# Altium PCB PCB2.PcbDoc
Units mm, origin at the board's own origin, x right, y up, seen from the top; angles counter-clockwise.
Board outline 50 x 50 mm, 2 copper layers (Top Layer, Bottom Layer); 13 components, 10 nets, 35 pads, 6 vias.
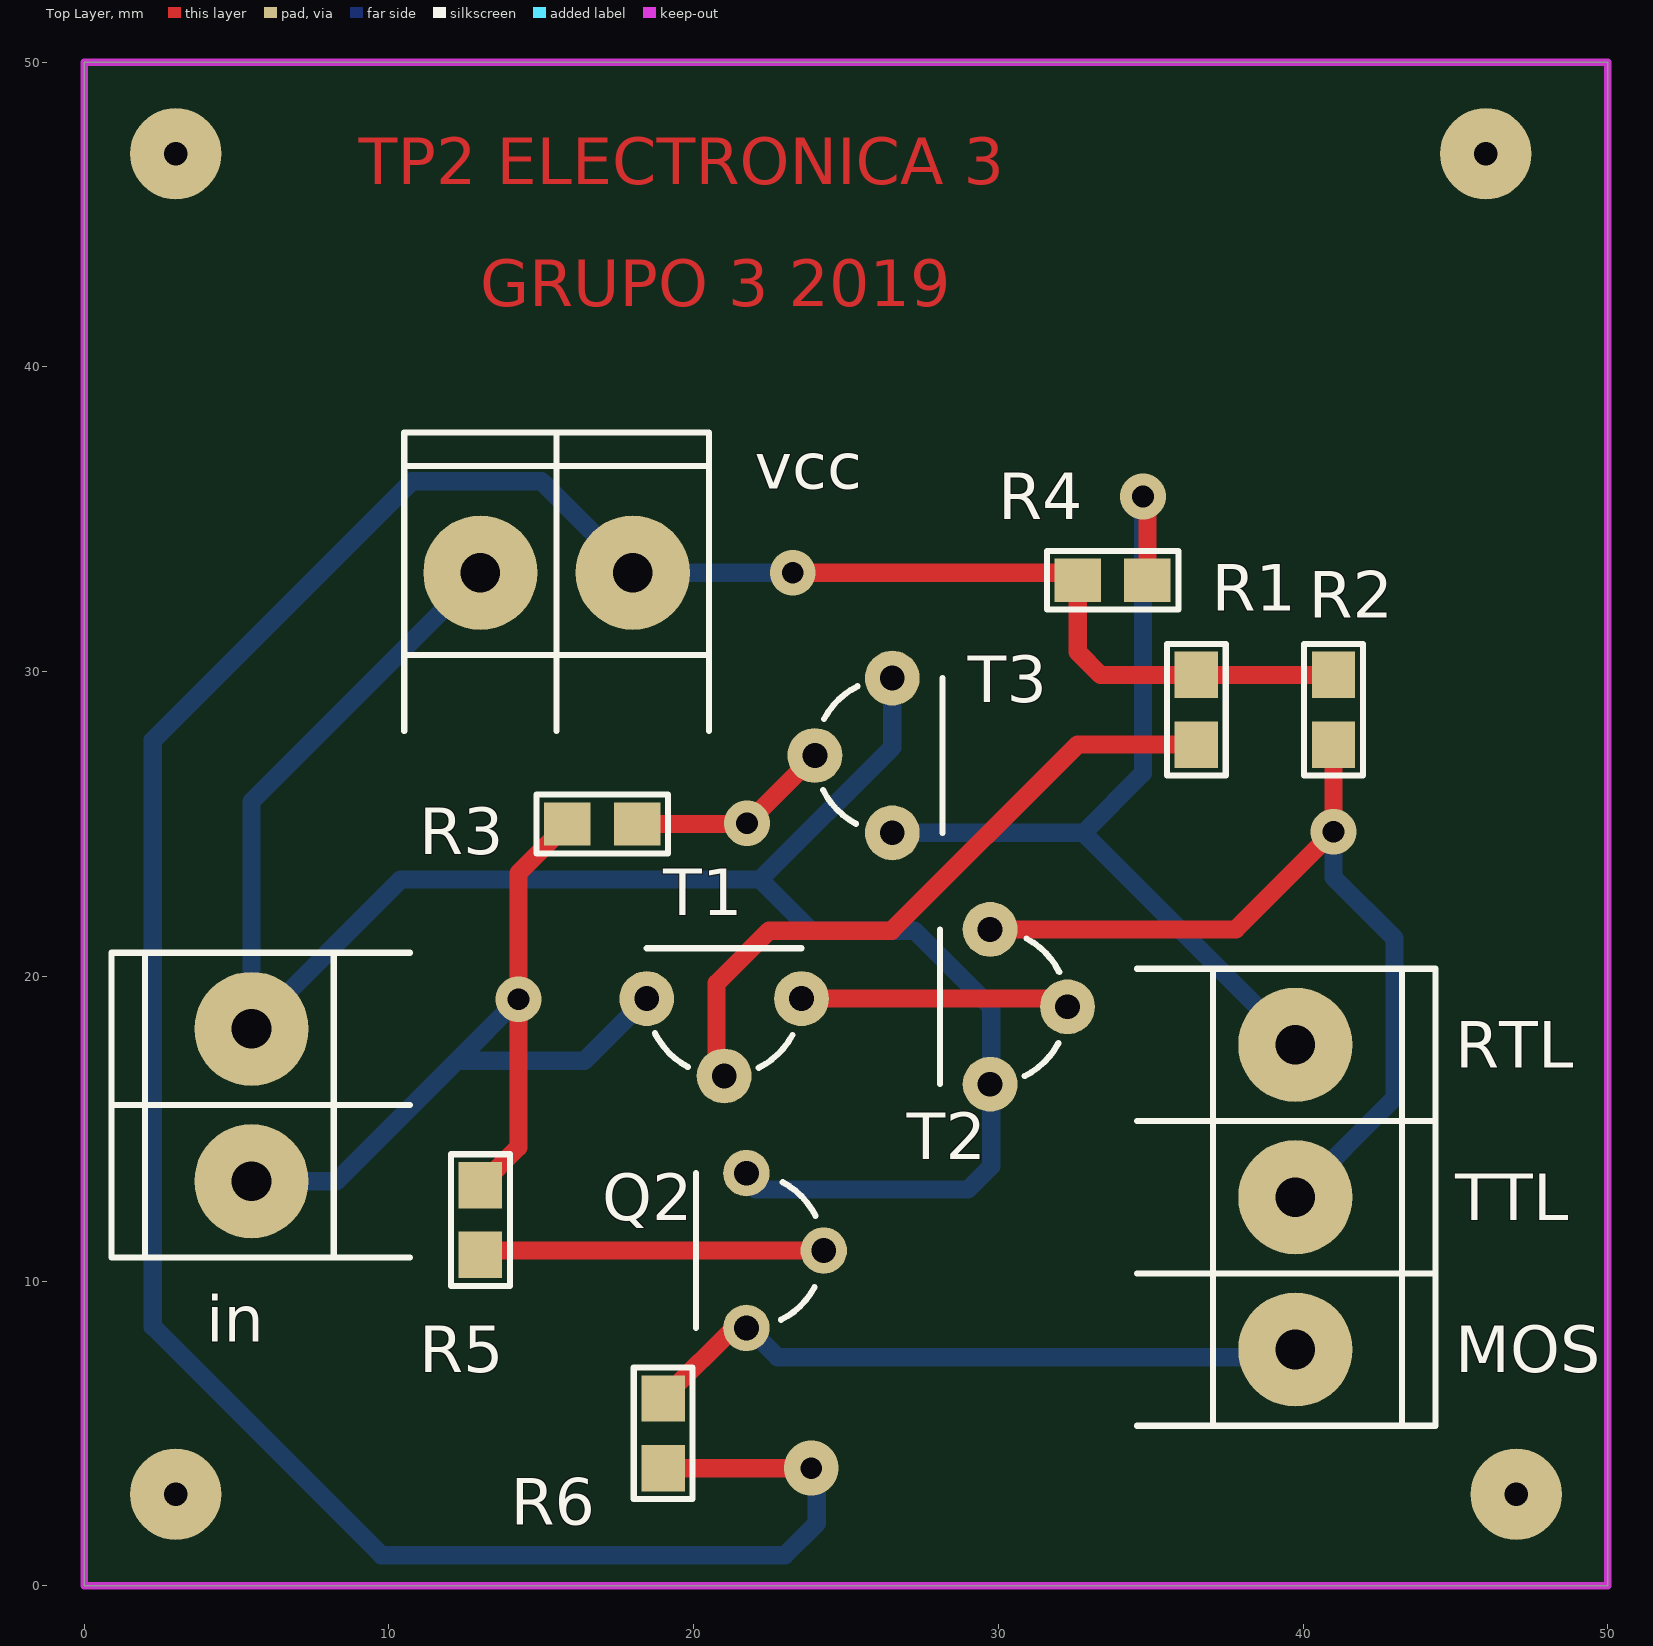
[diagram p0: Top Layer view]
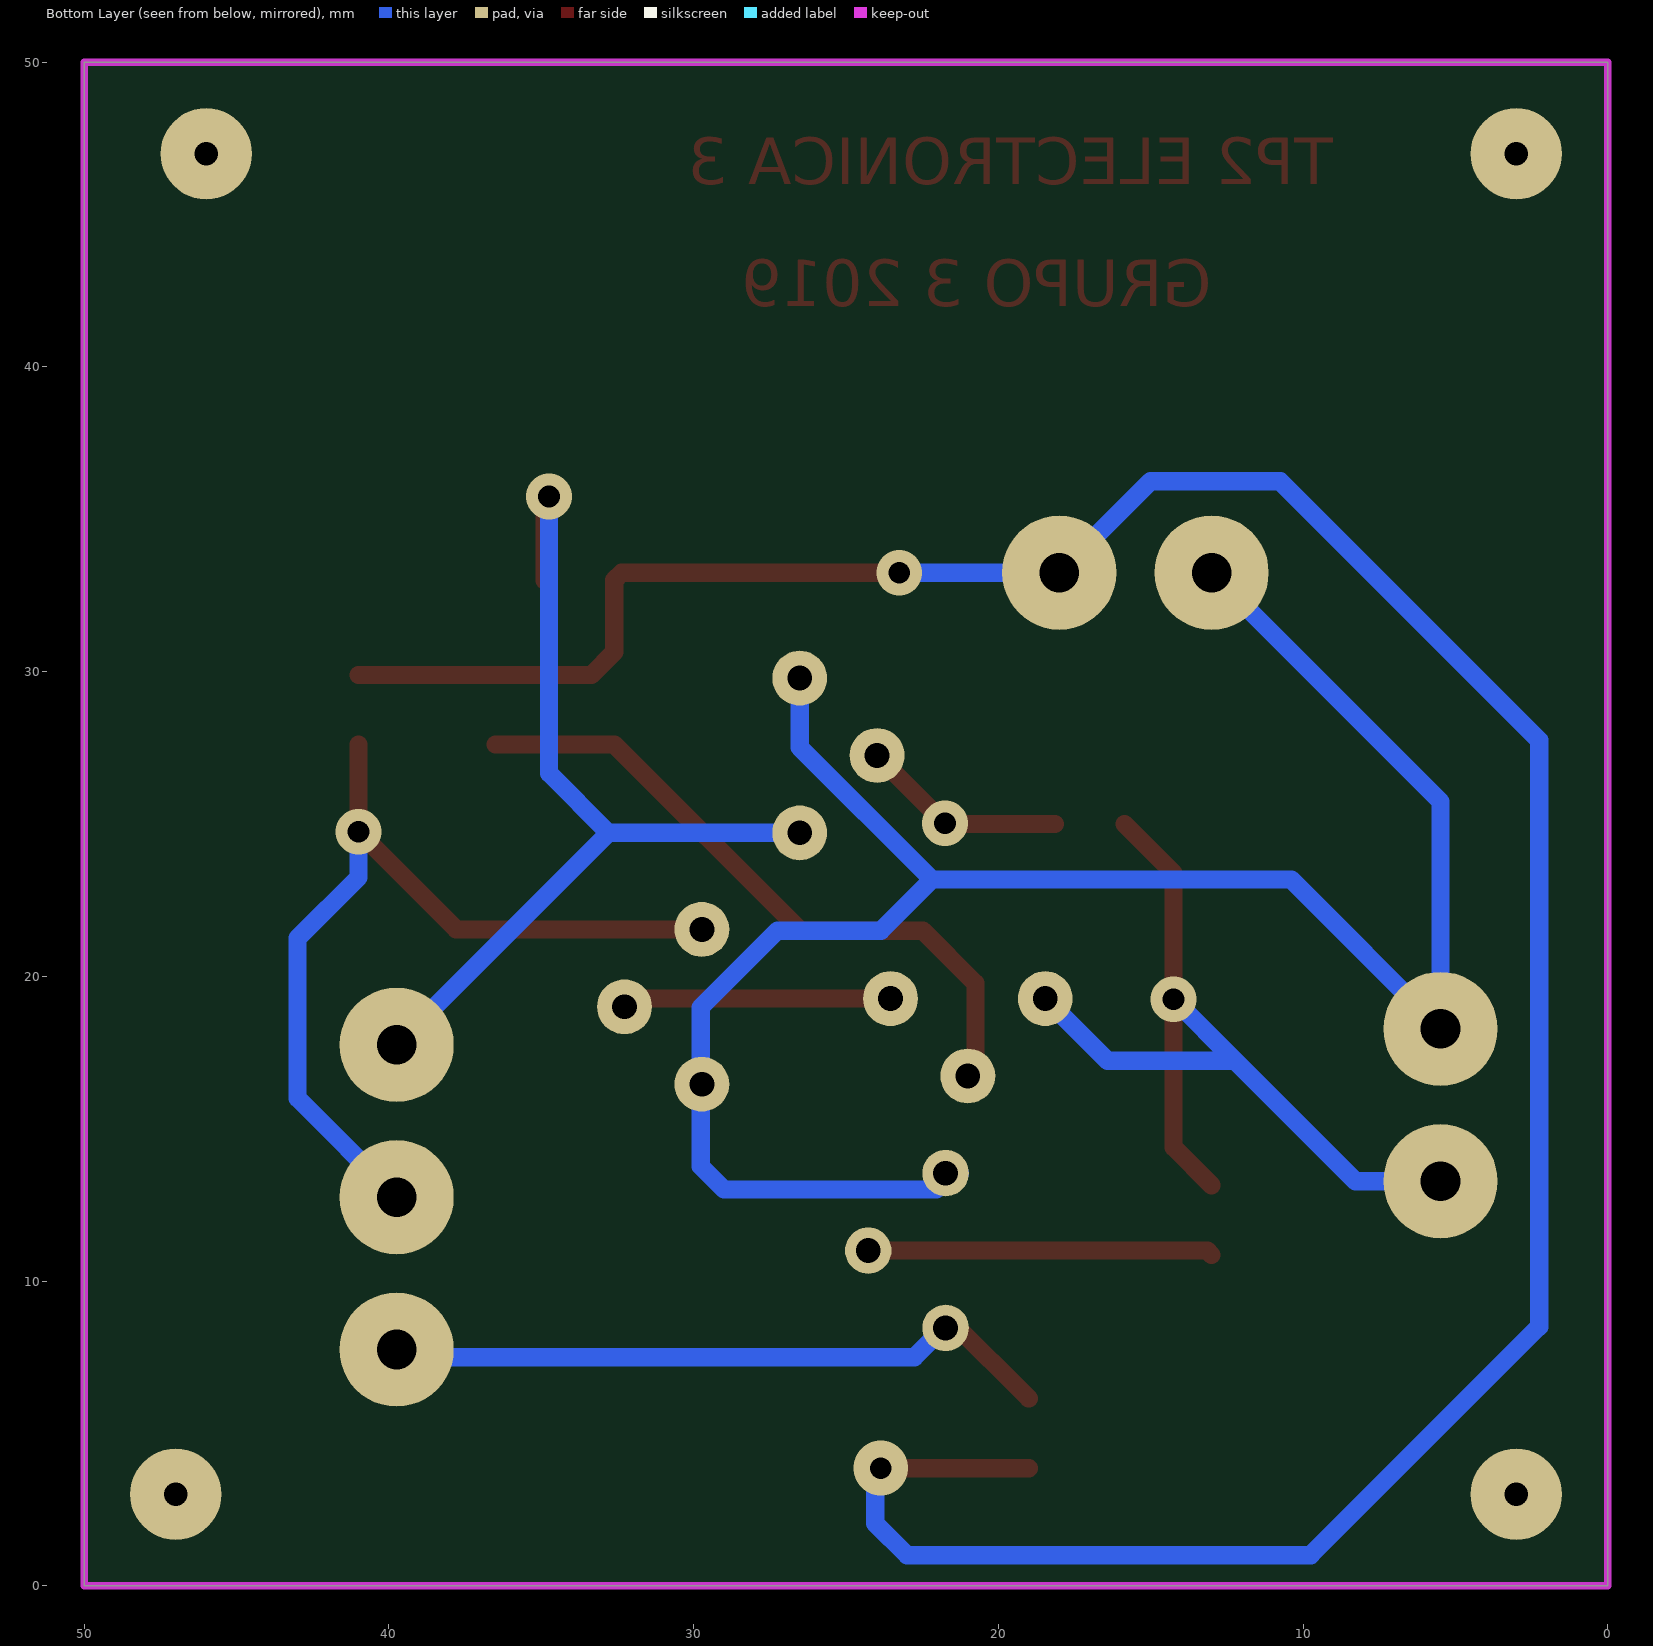
[diagram p1: Bottom Layer view, seen from below]
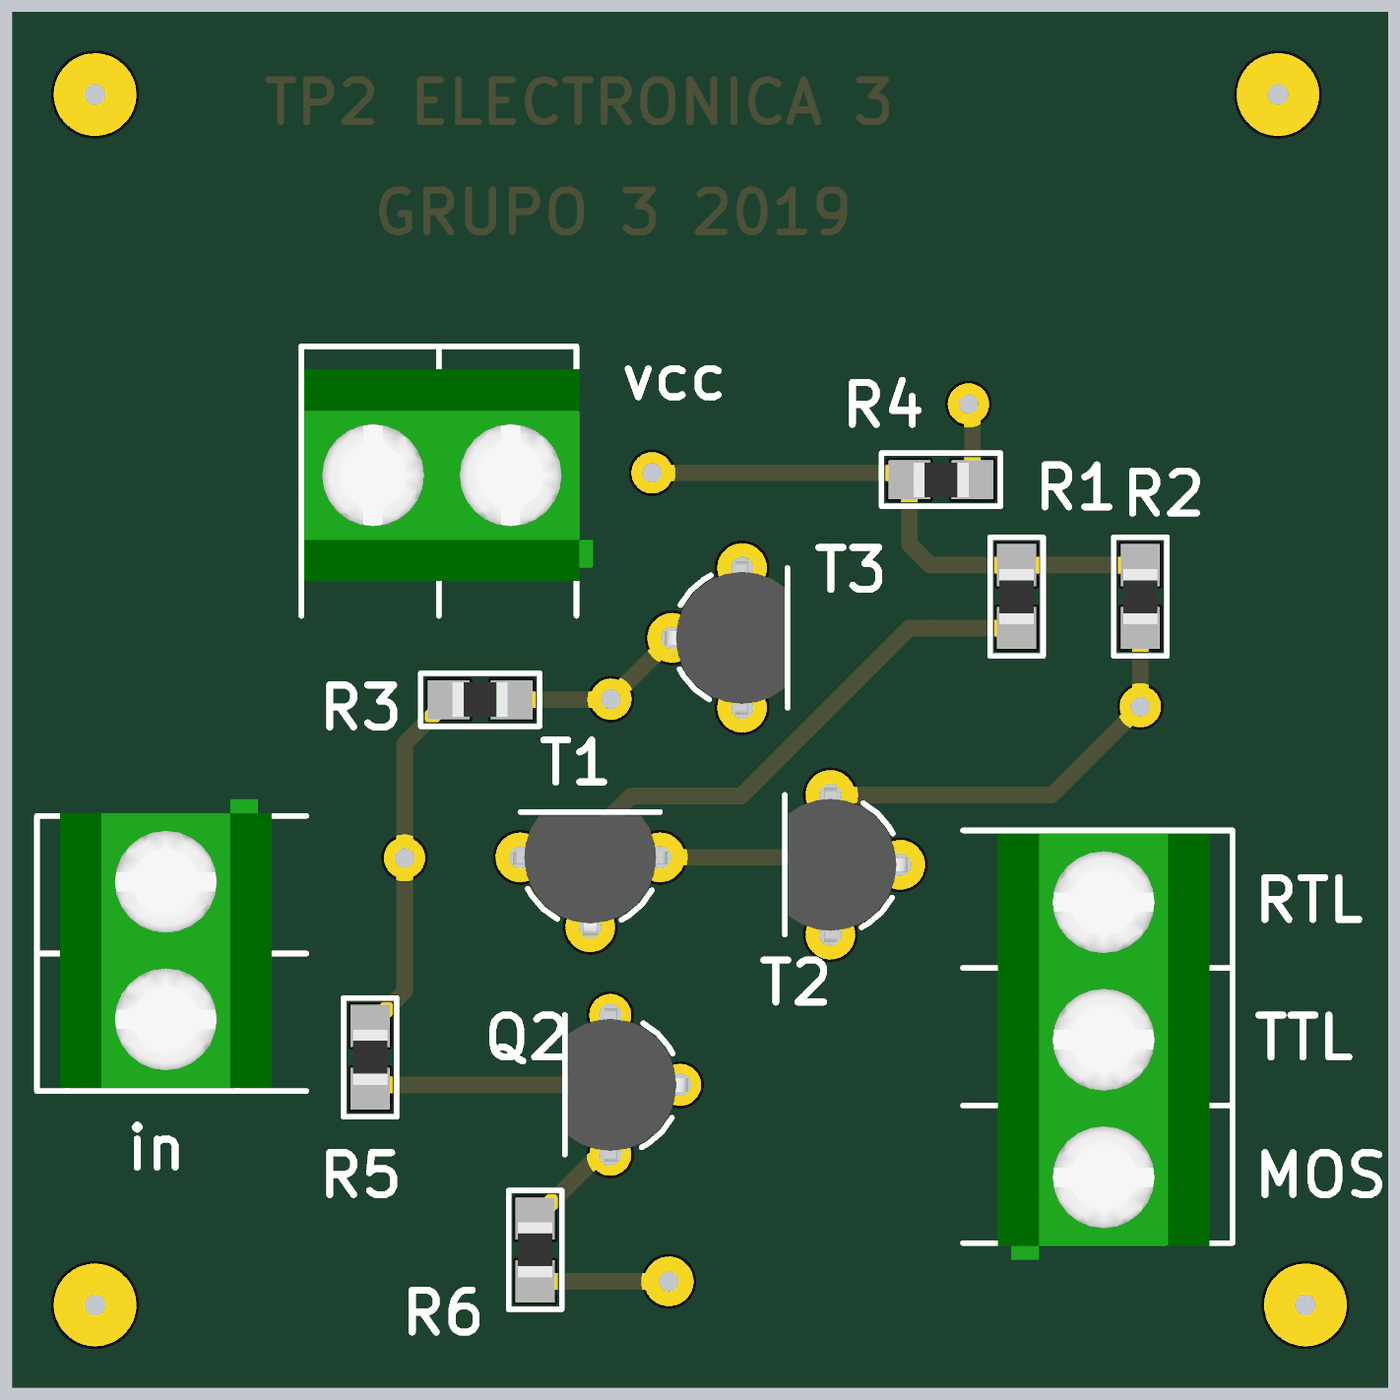
[diagram p2: 3D render of the assembled board from above, using the file's embedded part models]

## Layer stack, top to bottom
Top Solder: solder mask 0.0102, Solder Resist, Dk 3.5
Top Layer: signal copper 0.0356
Dielectric 1: dielectric 0.32, FR-4, Dk 4.8
Bottom Layer: signal copper 0.0356
Bottom Solder: solder mask 0.0102, Solder Resist, Dk 3.5

## Board outline
0,0 0,50 50,50 50,0

## Design rules (kind name [scope] priority, off if disabled: settings)
Clearance [All] p1: gap=0.254
PolygonConnect [All] p1: connectstyle=Relief reliefconductorwidth=0.254 reliefentries=4 polygonreliefangle="90 Angle" airgapwidth=0.254
RoutingVias [All] p1: holewidth=0.711 width=1.27 viastyle="Through Hole" minholewidth=0.711 minwidth=1.27 maxholewidth=0.711 maxwidth=1.27
SolderMaskExpansion [All] p1: expansion=0.102
Width [All] p1: maxlimit=0.6 minlimit=0.6 preferedwidth=0.6
30 further rules are at their usual default settings.

## Components (designator, comment, footprint, x,y, rotation, side; value= is the part's Value field where it differs from the comment)
in "BORNERA 2" BORNERA2 5.486,15.775 r0 top
Q2 "MOSFET N" TO92#1 23,11 r90 top
R1 "4.7k" 0805 36.5,28.75 r90 top
R2 "1K" 0805 41,28.75 r90 top
R3 "15K" 0805 17,25 r0 top
R4 "1K" 0805 33.75,33 r180 top
R5 "15K" 0805 13,12 r270 top
R6 "1K" 0805 19,5 r270 top
RTL "BORNERA 3" BORNERA3 39.75,12.75 r180 top (schematic designator out)
T1 "2N2222" TO92#2 21,18 r0 top
T2 "2N2222" TO92#2 31,19 r90 top
T3 "2N2222" TO92#2 25.25,27.25 r270 top
vcc "BORNERA 2" BORNERA2 15.5,33.25 r270 top

## Footprints (in the part's own frame and the unit in brackets; to place one, negate y for a bottom-side part, rotate by r counter-clockwise, add the part's x,y. Pads: shape width x height; smd on the part's side, far side on the other; paste and mask are expansions set on the pad)
0805 [mil] "Pasivo 0805"
  rect 60x56 smd: 1(-45,0) 2(45,0)
  silkscreen extent -85,-38 85,38, body extent -40,-25 39,25, height 15
BORNERA2 [mm] "Bornera con Tornillos 5mm separación"
  round 3.75 hole 1.3: 1(0,2.5) 2(0,-2.5)
  silkscreen extent -4.6,-5 5.2,5, body extent -3.76,-4.89 3.94,5.61, height 10
BORNERA3 [mm] "Bornera con Tornillos 5mm separación"
  round 3.75 hole 1.3: 1(0,5) 2(0,0) 3(0,-5)
  silkscreen extent -4.6,-7.5 5.2,7.5, body extent -3.76,-7.39 3.94,8.11, height 10.05
TO92#1 [mil]
  round 60 hole 32: 1(0,-50) 2(100,50) 3(-100,50)
  silkscreen extent -100,-39 100,115, body extent -110,-61 110,110, height 315
TO92#2 [mil]
  round 70.87 hole 32: 1(0,-50) 2(100,50) 3(-100,50)
  silkscreen extent -100,-39 100,115, body extent -110,-61 110,110, height 315

## Part data
R1 R2 R3 R4 R5 R6: library part RES

## Free pads (board coordinates)
  round 3 hole 0.762: 0(3,3) 0(3,47) 0(46,47) 0(47,3)

## Via types
v1: diameter 1.5, hole 0.711, Top Layer to Bottom Layer, 5 vias
v2: diameter 1.8, hole 0.711, Top Layer to Bottom Layer, 1 vias

## Nets (pads, with @x,y where several pads share a name; then routed paths per layer and width w, separated by ;. In a path a pad name is that pad's centre, name@x,y a point inside that pad or via, vN(x,y) a via of type N, cw(c..) or ccw(c..) an arc to the next point about the centre after c; other vN are vias at no path point)
GND: in.1 Q2.2 T2.3 T3.3 vcc.2 | length 68.8
  Bottom Layer w0.6: vcc.2 5.486,25.736 in.1 10.386,23.175 22.175,23.175 ; Q2.2@21.27,13.54 21.5,13.54 22.04,13 29,13 29.77,13.77 29.77,18.98 27.25,21.5 23.85,21.5 22.175,23.175 ; T3.3 26.52,27.52 22.175,23.175
NetQ2_1: Q2.1 R5.2 | length 11.3
  Top Layer w0.6: R5.2 13.143,11 Q2.1
NetR1_1: R1.1 T1.1 | length 22.1
  Top Layer w0.6: T1.1 20.75,16.98 20.75,19.77 22.48,21.5 26.5,21.5 32.607,27.607 R1.1
NetR3_2: R3.2 T3.1 | length 6.8
  Top Layer w0.6: R3.2 21.73,25 v1(21.75,25.02) T3.1
NetT1_3: T1.2 T2.1 | length 8.8
  Top Layer w0.6: T1.2 32,19.27 T2.1
VCC: R1.2 R2.2 R4.2 R6.2 vcc.1 | length 97.2
  Top Layer w0.6: R6.2 v2(23.857,3.857) ; v1(23.25,33.25) 32.357,33.25 R4.2 32.607,30.643 33.357,29.893 R1.2 R2.2
  Bottom Layer w0.6: v1(23.25,33.25) vcc.1 15,36.25 10.75,36.25 2.25,27.75 2.25,8.5 9.75,1 23,1 24.04,2.04 v2@24.04,3.5
VIN: in.2 R3.1 R5.1 T1.3 | length 32
  Top Layer w0.6: R5.1 14.25,14.393 v1(14.25,19.25) 14.25,23.393 R3.1
  Bottom Layer w0.6: in.2@5.961,13.75 in.2 8.275,13.275 12.23,17.23 ; v1(14.25,19.25) 12.23,17.23 ; T1.3 16.42,17.23 12.23,17.23
VOUT-MOS: Q2.3 R6.1 RTL.1 | length 22.4
  Top Layer w0.6: R6.1 Q2.3@21.5,8.643
  Bottom Layer w0.6: Q2.3@21.5,8.75 22.75,7.5 39.5,7.5 RTL.1
VOUT-RTL: R4.1 RTL.3 T3.2 | length 30.8
  Top Layer w0.6: v1(34.75,35.75) 34.893,35.607 R4.1
  Bottom Layer w0.6: T3.2 32.79,24.71 ; v1(34.75,35.75) 34.75,26.67 32.79,24.71 ; RTL.3 32.79,24.71
VOUT-TTL: R2.1 RTL.2 T2.2 | length 30.3
  Top Layer w0.6: T2.2 37.79,21.54 v1(41,24.75) R2.1
  Bottom Layer w0.6: RTL.2@39.25,13.25 RTL.2 43,16 43,21.25 41,23.25 v1(41,24.75)

## Keep-outs
Keep-Out Layer:
  lines w0.254: 50,0 50,50 ; 50,0 50,0 ; 50,0 0,0 0,50 50,50 ; 50,50 50,50

## Other copper
Top Layer:
  text "TP2 ELECTRONICA 3" at 9,46 h1.52
  text "GRUPO 3 2019" at 13,42 h1.52

## Silkscreen, mask and mechanical layers (free items; w line width, h text height)
Top Overlay:
  text "TTL" at 45,12 h1.52
  text "MOS" at 45,7 h1.52